# EAGLE board ALL copy (EAGLE 9.2.2)
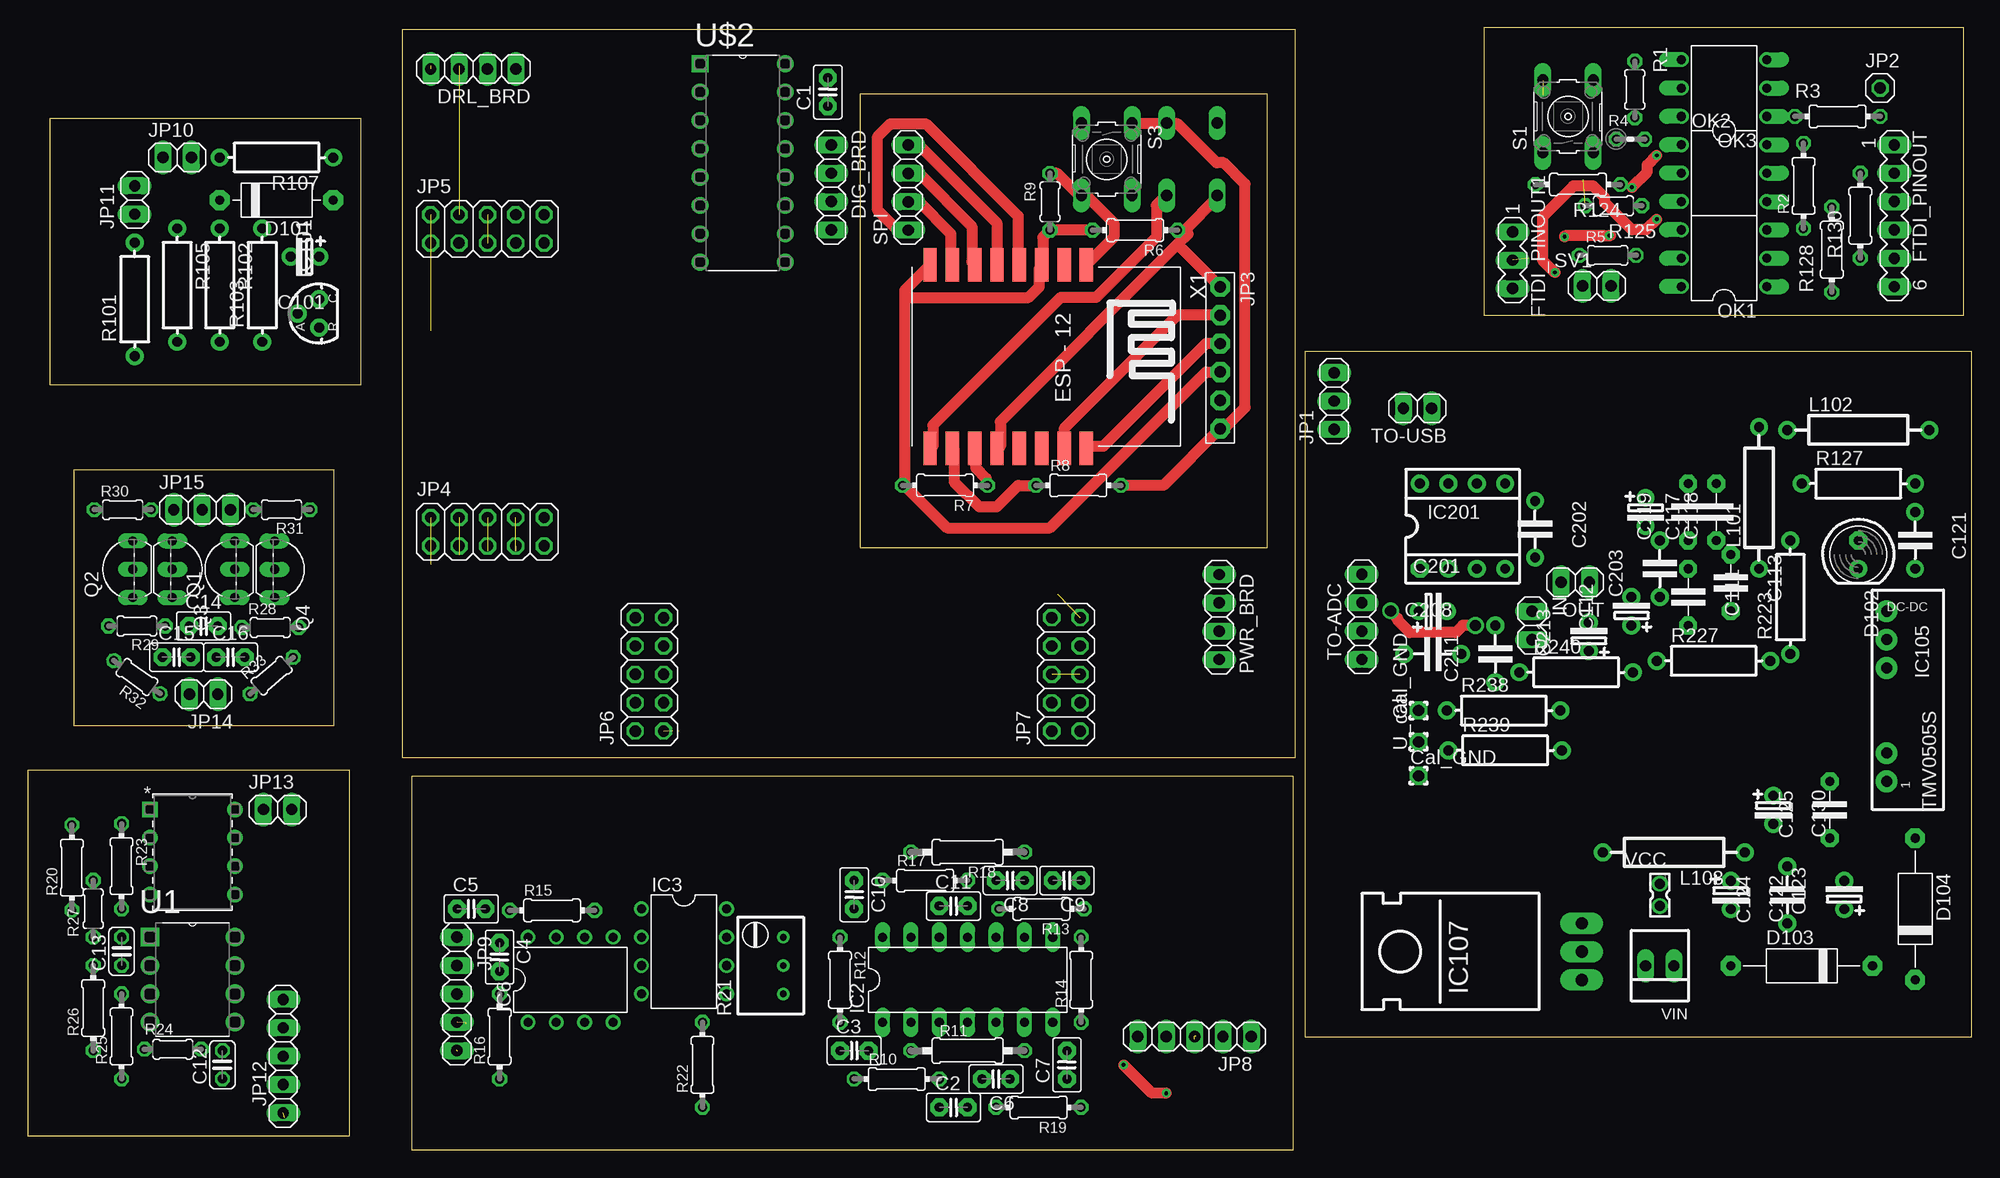
[diagram p0: board, top side]
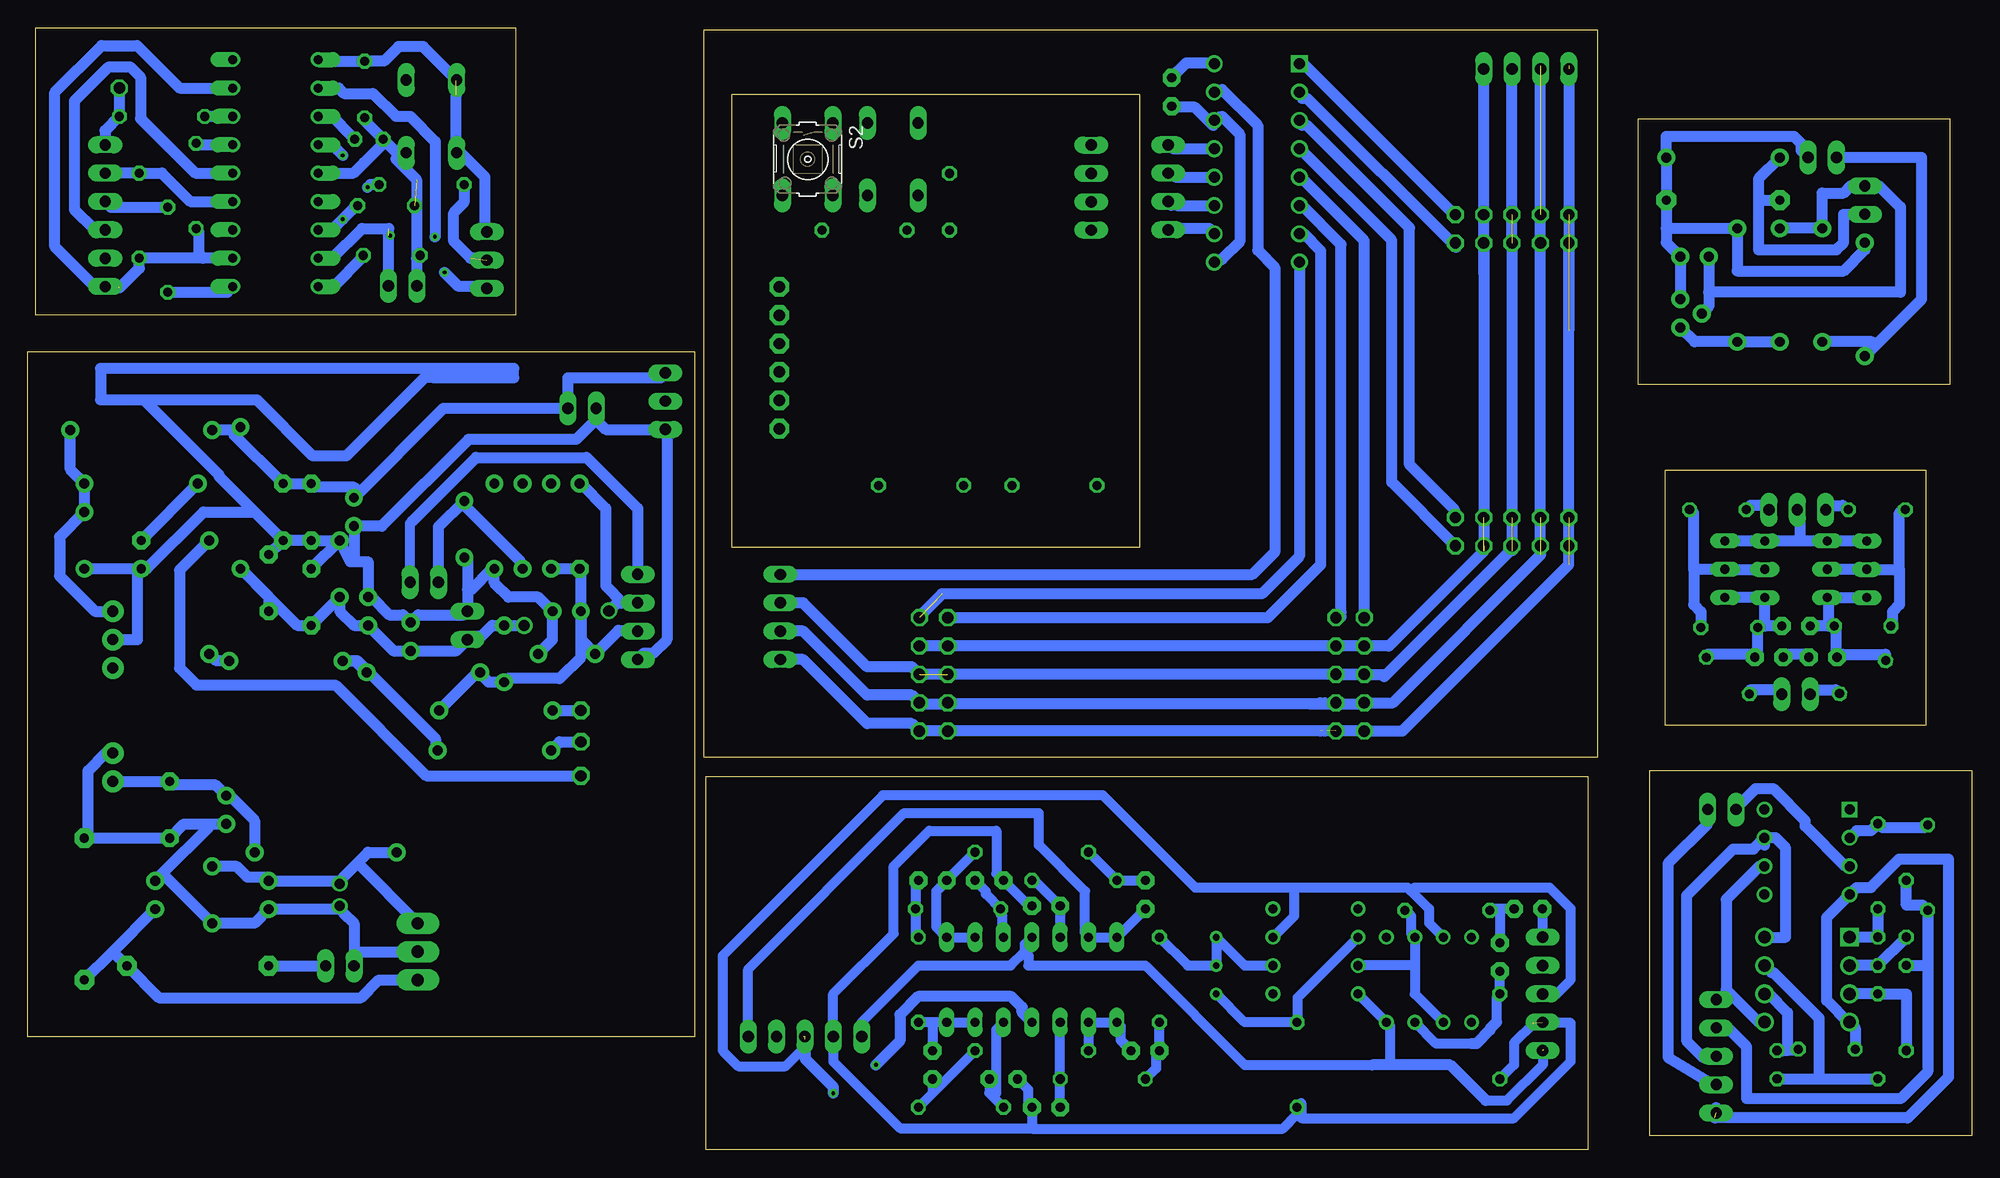
[diagram p1: board, bottom side, seen from below]

Size 174.03 x 100.48 mm. Coordinates in mm from the lower left corner, seen from the top.
Outline: 114.36,10.14 174.03,10.14 174.03,71.5 114.36,71.5 114.36,10.14
Outline: 130.37,74.78 173.31,74.78 173.31,100.48 130.37,100.48 130.37,74.78
Outline: 74.49,94.56 74.49,53.94 110.99,53.94 110.99,94.56 74.49,94.56
Outline: 33.52,35.16 113.51,35.16 113.51,100.3 33.52,100.3 33.52,35.16
Outline: 1.94,68.56 29.86,68.56 29.86,92.36 1.94,92.36 1.94,68.56
Outline: 0,1.28 28.81,1.28 28.81,33.97 0,33.97 0,1.28
Outline: 27.41,38.03 27.41,60.87 4.12,60.87 4.12,38.03 27.41,38.03
Outline: 34.34,0 113.33,0 113.33,33.45 34.34,33.45 34.34,0
Copper layers (1*16): Top 0.035mm / dielectric 1.5mm / Bottom 0.035mm
Design rules "default *": minimum track width 0.9mm, minimum drill 0.35mm, track to track 0.6mm, track to pad 0.6mm, pad to pad 0.6mm, via to via 0.6mm, smd to smd 6mil, copper to edge 40mil, drill to drill 6mil, minimum pad ring 10mil, minimum via ring 8mil, stop-mask expansion 4mil, vias tented up to drill 0mil, thermal gap 10mil
tKeepout: 13 lines

## Footprints (pad centres in the part's own frame; a part is rotated, then mirrored left to right if it is on the bottom)
C2.5-2 = drill 0.813 pad 1.6 octagon: 1 -1.27,0; 2 1.27,0
C025-024X044 = drill 0.813 octagon: 1 -1.27,0; 2 1.27,0
EL25B = drill 0.889 pad 1.6: 1 -1.27,0; 2 1.27,0
C-5 = drill 0.813 pad 1.6 octagon: 1 -2.54,0; 2 2.54,0
C-5@1 = drill 0.889 pad 1.6: 1 -2.54,0; 2 2.54,0
C-5' = drill 0.889 pad 1.6: 1 -2.54,0; 2 2.54,0
D-10 = drill 0.813 pad 1.778 octagon: 1 -5.08,0; 2 5.08,0
LED5 = drill 0.813 pad 1.6 octagon: A -1.27,0 | drill 0.813 pad 1.6: K 1.27,0
D-12,5 = drill 0.813 pad 1.778 octagon: 1 -6.35,0; 2 6.35,0
1X04 = drill 1.016 long: 1 -3.81,0; 2 -1.27,0; 3 1.27,0; 4 3.81,0
MA06-1 = drill 1.016 long: 1 -6.35,0; 2 -3.81,0; 3 -1.27,0; 4 1.27,0; 5 3.81,0; 6 6.35,0
MA03-1 = drill 1.016 long: 1 -2.54,0; 2 0,0; 3 2.54,0
DIL14 = drill 0.813 long: 1 -7.62,-3.81; 2 -5.08,-3.81; 3 -2.54,-3.81; 4 0,-3.81; 5 2.54,-3.81; 6 5.08,-3.81; 7 7.62,-3.81; 8 7.62,3.81; 9 5.08,3.81; 10 2.54,3.81; 11 0,3.81; 12 -2.54,3.81; 13 -5.08,3.81; 14 -7.62,3.81
DIL08 = drill 0.813 pad 1.27: 1 -3.81,-3.81; 2 -1.27,-3.81; 3 1.27,-3.81; 4 3.81,-3.81; 5 3.81,3.81; 6 1.27,3.81; 7 -1.27,3.81; 8 -3.81,3.81
TO92-CLP = drill 0.889 pad 1.6: A 0,1.905; C 1.27,0; R -1.27,0
MEJDCDC-SC = drill 0.991 pad 1.93: 1 1.27,6.35; 2 1.27,3.81; 5 1.27,-3.81; 7 1.27,-8.89 | drill 1 pad 1.93: 6 1.27,-6.35
78XXL_S = drill 1.092 pad 1.905 long: GND 0,-0.635; IN -2.54,-0.635; OUT 2.54,-0.635
DIL-08 = drill 0.889 pad 1.6 octagon: 1 -3.81,-3.81 | drill 0.889 pad 1.6: 2 -1.27,-3.81; 3 1.27,-3.81; 4 3.81,-3.81; 5 3.81,3.81; 6 1.27,3.81; 7 -1.27,3.81; 8 -3.81,3.81
1X02 = drill 1.016 long: 1 -1.27,0; 2 1.27,0
1X03 = drill 1.016 long: 1 -2.54,0; 2 0,0; 3 2.54,0
1X01 = drill 1.016 octagon: 1 0,0
1X06-BIG = drill 1.016 pad 1.778 octagon: 1 -6.35,0; 2 -3.81,0; 3 -1.27,0; 4 1.27,0; 5 3.81,0; 6 6.35,0
2X05 = drill 1.016 octagon: 1 -5.08,-1.27; 2 -5.08,1.27; 3 -2.54,-1.27; 4 -2.54,1.27; 5 0,-1.27; 6 0,1.27; 7 2.54,-1.27; 8 2.54,1.27; 9 5.08,-1.27; 10 5.08,1.27
1X05 = drill 1.016 long: 1 -5.08,0; 2 -2.54,0; 3 0,0; 4 2.54,0; 5 5.08,0
R-12,5 = drill 0.889 pad 1.6: 1 -6.35,0; 2 6.35,0
DIL06 = drill 0.813 offset: 1 -2.54,-3.81; 2 0,-3.81; 3 2.54,-3.81; 4 2.54,3.81; 5 0,3.81; 6 -2.54,3.81
WIREPAD1 = drill 0.991 pad 1.6 octagon: 1 0,0
TO92-EBC = drill 0.813 long: B 0,-1.27; C -2.54,-1.27; E 2.54,-1.27
0204/5 = drill 0.813 octagon: 1 -2.54,0; 2 2.54,0
0204/7 = drill 0.813 octagon: 1 -3.81,0; 2 3.81,0
0204V = drill 0.813 octagon: 1 -1.27,0; 2 1.27,0
0207/10 = drill 0.813 octagon: 1 -5.08,0; 2 5.08,0
RTRIM3299W = drill 0.61: 1 1.27,-2.54; 2 1.27,0; 3 1.27,2.54
R-10 = drill 0.889 pad 1.6: 1 -5.08,0; 2 5.08,0
B3F-10XX = drill 1.016 long: 1 -3.251,2.261; 2 3.251,2.261; 3 -3.251,-2.261; 4 3.251,-2.261
DIP254P762X508-8 = drill 1.118 square: 1 -7.62,7.62 | drill 1.118: 2 -7.62,5.08; 3 -7.62,2.54; 4 -7.62,0; 5 0,0; 6 0,2.54; 7 0,5.08; 8 0,7.62
LT1012ACN8_PDIP-8_N = drill 0.889 pad 1.397 square: 1 -7.62,7.62 | drill 0.889 pad 1.397: 2 -7.62,5.08; 3 -7.62,2.54; 4 -7.62,0; 5 0,0; 6 0,2.54; 7 0,5.08; 8 0,7.62
DIP254P762X432-16 = drill 0.991 square: 1 -7.62,17.78 | drill 0.991: 2 -7.62,15.24; 3 -7.62,12.7; 4 -7.62,10.16; 5 -7.62,7.62; 6 -7.62,5.08; 7 -7.62,2.54; 8 -7.62,0; 9 0,0; 10 0,2.54; 11 0,5.08; 12 0,7.62; 13 0,10.16; 14 0,12.7; 15 0,15.24; 16 0,17.78
87758-0216 = drill 0.9 pad 1.27: 1 0,-1; 2 0,1
22-23-2021 = drill 1 long: 1 -1.27,0; 2 1.27,0
ESP12-SMD = smd 3 x 1.2: ADC -8.3,3.8; CH_PD -8.3,1.8; GND 8.1,-8.2; GPIO0 8.1,-2.2; GPIO2 8.1,-4.2; GPIO4 8.1,1.8; GPIO5 8.1,-0.2; GPIO12 -8.3,-4.2; GPIO13 -8.3,-6.2; GPIO14 -8.3,-2.2; GPIO15 8.1,-6.2; GPIO16 -8.3,-0.2; RESET -8.3,5.8; RXD0 8.1,3.8; TXD0 8.1,5.8; VCC -8.3,-8.2

## Placement (x,y rotation side)
C1  [C2.5-2]  71.62,94.74 90 top
C2  [C2.5-2]  82.87,3.81 0 top
C3  [C2.5-2]  73.98,8.89 0 top
C4  [C2.5-2]  42.23,17.27 270 top
C5  [C2.5-2]  39.69,21.59 0 top
C6  [C2.5-2]  86.68,6.35 180 top
C7  [C2.5-2]  93.03,7.62 90 top
C8  [C2.5-2]  87.95,24.13 180 top
C9  [C2.5-2]  93.03,24.13 180 top
C10  [C2.5-2]  73.98,22.86 270 top
C11  [C2.5-2]  82.87,21.84 0 top
C12  [C025-024X044]  17.41,7.63 90 top
C13  [C025-024X044]  8.38,17.79 90 top
C14  [C2.5-2]  15.73,46.92 0 top
C15  [C2.5-2]  13.31,44.13 0 top
C16  [C2.5-2]  18.14,44.13 0 top
C101  10µF  [EL25B]  24.8,79.99 180 top
C111  100nF  [C-5]  148.65,49.51 270 top
C112  47µF  [EL25B]  143.57,48.24 90 top
C113  10nF  [C-5]  152.46,50.78 270 top
C117  100nF  [C-5]  151.19,57.13 90 top
C118  47µF  [EL25B]  144.84,57.13 270 top
C119  10nF  [C-5]  148.65,57.13 90 top
C121  100nF  [C-5@1]  168.97,54.59 270 top
C122  1µF  [EL25B]  152.46,22.84 270 top
C123  1µF  [EL25B]  162.62,22.84 90 top
C124  100nF  [C-5@1]  157.54,22.84 90 top
C125  100nF  [C-5]  161.35,30.46 90 top
C130  47µF  [EL25B]  156.27,30.46 270 top
C201  47µF tan 1ohm  [EL25B]  125.79,48.24 0 top
C202  10nF  [C-5']  134.95,55.59 270 top
C203  10nF  [C-5']  146.11,52.05 90 top
C208  100nF  [C-5']  125.79,44.43 0 top
C211  100nF  [C-5']  131.38,44.43 90 top
C213  47µF  [EL25B]  139.76,45.97 90 top
D101  1N5818  [D-10]  22.26,85.07 180 top
D102  LED5  [LED5]  163.89,53.32 270 top
D103  1N5818  [D-12,5]  158.81,16.49 0 top
D104  1N5818  [D-12,5]  168.97,21.57 270 top
DIG_BRD  [1X04]  71.92,86.2 270 top
DRL_BRD  [1X04]  39.87,96.82 180 top
FTDI_PINOUT  [MA06-1]  167.11,83.67 270 top
FTDI_PINOUT1  [MA03-1]  132.94,79.68 270 top
IC2  LM324N  [DIL14]  84.14,15.24 0 top
IC3  TL071P  [DIL08]  58.74,17.78 270 top
IC6  TL071P  [DIL08]  48.58,15.24 0 top
IC101  TL431CLP  [TO92-CLP]  26.07,74.91 90 top
IC105  TMV0505S  [MEJDCDC-SC]  167.7,39.35 180 top
IC107  7805  [78XXL_S]  138.49,17.76 90 top
IC201  TLC277P  [DIL-08]  128.46,55.86 0 top
IN  [1X02]  134.68,46.97 270 top
JP1  [1X03]  116.95,67.06 90 top
JP2  [1X01]  165.84,95.1 0 top
JP3  [1X06-BIG]  106.75,70.94 270 top
JP4  [2X05]  41.14,55.37 0 top
JP5  [2X05]  41.14,82.48 0 top
JP6  [2X05]  55.65,42.59 90 top
JP7  [2X05]  92.94,42.59 90 top
JP8  [1X05]  104.46,10.16 180 top
JP9  [1X05]  38.42,13.97 270 top
JP10  [1X02]  13.37,88.88 0 top
JP11  [1X02]  9.56,85.07 90 top
JP12  [1X05]  22.86,8.39 90 top
JP13  [1X02]  22.35,30.49 0 top
JP14  [1X02]  15.73,40.82 180 top
JP15  [1X03]  15.6,57.33 0 top
L101  22µH  [R-12,5]  155,58.4 90 top
L102  22µH  [R-12,5]  163.89,64.48 0 top
L103  22µH  [R-12,5]  147.38,26.65 180 top
OK1  4N27M  [DIL06]  151.87,79.86 90 top
OK2  4N27M  [DIL06]  151.87,87.48 270 top
OK3  4N27M  [DIL06]  151.87,95.1 90 top
OUT  [1X02]  138.54,50.83 180 top
PAD1  Cal_GND  [WIREPAD1]  124.52,33.51 0 top
PAD203  U_cal  [WIREPAD1]  124.52,36.56 90 top
PAD204  Cal_GND  [WIREPAD1]  124.52,39.35 90 top
PWR_BRD  [1X04]  106.66,47.73 270 top
Q1  BC559A  [TO92-EBC]  17.25,52 90 top
Q2  BC559A  [TO92-EBC]  8.11,52 90 top
Q3  BC559A  [TO92-EBC]  14.2,52 270 top
Q4  BC559A  [TO92-EBC]  23.35,52 270 top
R1  1k  [0204/5]  143.87,94.97 270 top
R2  1k  [0204/7]  158.98,86.33 90 top
R3  470R  [0204/7]  162.03,92.56 0 top
R4  1k  [0204V]  143.49,90.52 0 top
R5  1k  [0204/5]  141.46,80.11 0 top
R6  [0204/7]  99.13,82.37 180 top
R7  [0204/7]  82.11,59.51 180 top
R8  [0204/7]  94.05,59.51 0 top
R9  [0204/5]  91.51,84.91 90 top
R10  [0204/7]  77.79,6.35 0 top
R11  [0207/10]  84.14,8.89 0 top
R12  [0204/7]  72.71,15.24 270 top
R13  [0204/7]  90.74,21.59 180 top
R14  [0204/7]  94.3,15.24 90 top
R15  [0204/7]  46.93,21.46 0 top
R16  [0204/7]  42.23,10.16 90 top
R17  [0204/7]  80.33,24.13 0 top
R18  [0207/10]  84.14,26.67 180 top
R19  [0204/7]  90.49,3.81 180 top
R20  [0204/7]  3.94,25.28 90 top
R21  [RTRIM3299W]  66.36,16.51 0 top
R22  [0204/7]  60.39,7.62 90 top
R23  [0204/7]  8.38,25.41 270 top
R24  [0204/5]  12.97,9.03 0 top
R25  [0204/7]  8.38,10.17 90 top
R26  [0204/7]  5.84,12.71 90 top
R27  [0204/5]  5.84,21.6 90 top
R28  [0204/5]  21.69,46.79 0 top
R29  [0204/5]  9.76,46.92 180 top
R30  [0204/5]  8.49,57.33 0 top
R31  [0204/5]  22.71,57.33 180 top
R32  [0204/5]  9.76,42.35 144.5 top
R33  [0204/5]  21.82,42.47 40.4 top
R101  10k  [R-10]  9.56,76.18 90 top
R102  15k  [R-10]  17.18,77.45 270 top
R103  9k1  [R-10]  20.99,77.45 90 top
R105  10k  [R-10]  13.37,77.45 270 top
R107  470  [R-10]  22.26,88.88 180 top
R124  470R  [0204/7]  138.79,86.46 180 top
R125  1k  [0204/5]  141.96,84.55 180 top
R127  1k  [R-10]  163.89,59.67 0 top
R128  470R  [0204/7]  161.52,80.62 90 top
R130  1k  [0204/7]  164.06,83.67 90 top
R223  1M  [R-10]  157.79,49.51 90 top
R227  1M  [R-10]  150.94,43.8 0 top
R238  10k  [R-10]  132.14,39.35 0 top
R239  10k  [R-10]  132.27,35.79 0 top
R240  100  [R-10]  138.62,42.78 0 top
S1  [B3F-10XX]  137.9,92.56 90 top
S2  [B3F-10XX]  104.21,88.72 270 bottom
S3  [B3F-10XX]  96.59,88.72 270 top
SPI  [1X04]  78.81,86.18 90 top
SV1  [1X02]  140.47,77.37 0 top
TO-ADC  [1X04]  119.44,47.73 90 top
TO-USB  [1X02]  124.42,66.42 180 top
U1  TLC1078CP  [DIP254P762X508-8]  18.54,11.44 0 top
U3  LT1012ACN8  [LT1012ACN8_PDIP-8_N]  18.54,22.87 0 top
U$2  MCP3208-CI/P  [DIP254P762X432-16]  67.81,79.5 0 top
VCC  [87758-0216]  146.11,22.84 180 top
VIN  [22-23-2021]  146.11,16.49 180 top
X1  [ESP12-SMD]  88.97,70.94 270 top

## Library data of the parts
C1-C11 C14-C16 = capacitor-wima
C12 C13 R1-R9 R21 R124 R125 R128 R130 = resistor
C101 C202 C203 C208 C211 D101 R101-R103 R105 R107 R223 R227 R238-R240 = DISCRETE
C111-C113 C117-C119 C121 C124 C125 C130 D103 D104 R127 = discrete
C122 C123 C213 L101-L103 = DISCRETE@2
C201 = DISCRETE@3
D102 = led
DIG_BRD DRL_BRD IN JP1 JP2 JP4-JP15 OUT PWR_BRD SPI SV1 TO-ADC TO-USB = pinhead
FTDI_PINOUT FTDI_PINOUT1 = con-lstb; OC_FARNELL: unknown; OC_NEWARK: unknown
IC2 IC3 IC6 = linear
IC101 = V-REG
IC105 = modEEG
IC107 = V-REG@2
IC201 = BURR
JP3 = adafruit
OK1-OK3 = optocoupler; MF: FAIRCHILD SEMICONDUCTOR; MPN: 4N27M; OC_FARNELL: unknown; OC_NEWARK: 72K9939
PAD1 PAD203 PAD204 = WIREPAD@2
Q1-Q4 = transistor-pnp
R10-R19 R22 = eagle-ltspice; SPICEMODEL: NONE; SPICEPREFIX: R
R20 R23-R33 = rcl; SPICEPREFIX: R
S1-S3 = switch-omron; MPN: B3F-1000; OC_FARNELL: 176432; OC_NEWARK: 36M3542
U1 = SnapEDA-Library; MPN: TLC1078CP; OC_FARNELL: -; OC_NEWARK: 90B1029; PACKAGE: PDIP; SUPPLIER: Texas Instruments
U3 = SnapEDA-Library; COPYRIGHT: Copyright C 2016 Accelerated Designs. All rights reserved; DIGIKEY_PART_NUMBER: LT1012ACN8ND; MANUFACTURER_PART_NUMBER: LT1012ACN8; VENDOR: Linear Technology
U$2 = MCP3208-CI_P; AVAILABILITY: Good; DESCRIPTION: 8 Channel SPI Serial Interface 2.7 V 12-Bit A/D Converter Through Hole - PDIP-16; MF: Microchip; MP: MCP3208-CI/P; PACKAGE: DIP-16 Microchip; PRICE: 3.21 USD
VCC = con-molex; MF: MOLEX; MPN: 87758-0216; OC_FARNELL: unknown; OC_NEWARK: 94M1513
VIN = con-molex; MF: MOLEX; MPN: 22-23-2021; OC_FARNELL: 1462926; OC_NEWARK: 25C3832
X1 = esp8266modules

## Nets
2.0V: JP10.1 R101.1 R105.2
+5V: FTDI_PINOUT.4 OK2.5
+5V/1: C122.1 C124.2 IC107.OUT L103.2 VCC.1
+5V/2: D101.2 JP11.1 R107.2
+5V/3: OK1.5 OK3.5 SV1.2
+6TO12V: C123.1 D103.2 D104.2 IC107.IN
/RX: FTDI_PINOUT.2 OK2.4 R130.2
/TX: FTDI_PINOUT.3 R128.2
A-VCC: C111.2 C112.1 C113.2 C203.1 C211.2 C213.1 IC201.8 IN.2 L101.1 TO-ADC.3
CH+: JP14.1 R33.1
CH-: JP14.2 R32.1
CLK: SPI.4 X1.GPIO14
CLK1: DIG_BRD.1 U$2.13
CM: DRL_BRD.1 JP4.7 JP4.8 JP5.7 JP5.8 JP6.7 JP6.8 JP7.7 JP7.8
CMMR: JP12.4 R20.1 R26.2 R27.2
CS: SPI.1 X1.GPIO16
CS1: DIG_BRD.4 U$2.10
D-VCC: C117.2 C118.1 C119.2 JP1.3 L101.2 L102.1 TO-USB.1
D_IN: SPI.2 X1.GPIO13
D_OUT: SPI.3 X1.GPIO12
D_OUT1: DIG_BRD.2 U$2.12
DIN: DIG_BRD.3 U$2.11
DTR: FTDI_PINOUT.1 JP2.1 R3.2
GND: C111.1 C112.2 C113.1 C117.1 C118.2 C119.1 C121.2 C201.2 C202.2 C203.2 C208.2 C213.2 D102.K IC105.6 IC201.4 IN.1 JP1.1 TO-ADC.1 TO-USB.2
GND1: C122.2 C123.2 C124.1 C125.1 C130.2 D104.1 IC105.2 IC107.GND VCC.2 VIN.2
GND2: OK2.2 R1.2 R4.1 R5.1 R125.2 S1.3 SV1.1
GND3: FTDI_PINOUT.6 OK1.2 OK3.2 R2.1 R130.1
GND4: JP3.6 R8.2 S2.1 S3.1
GND5: C1.1 U$2.9 U$2.14
GND6: IC2.11 IC3.4 IC6.4 JP8.5 JP9.5
GND7: C101.2 IC101.A JP11.2 R102.1 R105.1
GND8: JP12.1 R24.1 U1.4 U3.4
INPUT: C5.1 JP9.1
INPUT1: JP13.1 U3.3
N$1: OK3.1 R3.1
N$2: OK2.6 R2.2
N$3: OK3.6 R4.2
N$4: R7.1 X1.GPIO2
N$5: OK1.6 R5.2
N$6: R9.2 S3.4 X1.RESET
N$7: S2.2 X1.GND
N$8: OK2.1 R124.1
N$9: R8.1 X1.GPIO15
N$10: JP3.1 R6.1 S2.4 X1.GPIO0
N$11: JP3.3 X1.TXD0
N$12: JP7.10 U$2.7
N$13: JP3.2 X1.RXD0
N$14: C121.1 IC105.7 L102.2 R127.2
N$15: D102.A R127.1
N$16: JP5.10 U$2.1
N$17: JP7.9 U$2.8
N$18: D103.1 VIN.1
N$19: JP6.9 U$2.6
N$20: JP6.10 U$2.5
N$21: JP4.9 U$2.4
N$22: PWR_BRD.1 U$2.15
N$23: C3.1 R10.1 R12.2
N$24: IC3.6 R12.1 R21.2 R21.3
N$25: JP4.10 U$2.3
N$26: C4.1 C5.2 R15.1
N$27: C2.1 IC2.3 R10.2
N$28: C4.2 IC6.3 R16.2
N$29: C7.1 R11.2 R19.1
N$30: PAD204.1 R238.1
N$31: C7.2 IC2.6 IC2.7 R14.1
N$32: JP5.9 U$2.2
N$33: C6.1 IC2.5 R19.2
N$34: R227.1 R239.2 R240.2
N$35: C9.1 R13.1 R14.2
N$36: C9.2 IC2.8 IC2.9 R18.1
N$37: C8.1 IC2.10 R13.2
N$38: C10.1 R17.1 R18.2
N$39: C11.1 IC2.12 R17.2
N$40: C3.2 IC2.1 IC2.2 R11.1
N$41: IC3.3 IC6.2 IC6.6 R15.2
N$42: IC101.R R102.2 R103.1
N$43: IC3.2 R21.1 R22.2
N$44: C125.2 C130.1 IC105.1 L103.1
N$45: R20.2 R23.1 U3.2
N$46: R223.1 R227.2
N$47: C13.2 R23.2 U1.1
N$48: PAD203.1 R239.1
N$49: C12.2 R24.2 U1.6
N$50: C12.1 R25.1 U1.7
N$51: R25.2 R26.1 U1.3
N$52: C13.1 R27.1 U1.2
N$53: JP12.2 JP13.2
N$54: Q1.B Q4.B R28.2 R31.1
N$55: Q2.B Q3.B R29.2 R30.1
N$56: C14.2 C16.2 Q1.C Q4.E R28.1 R33.2
N$57: C14.1 C15.1 Q2.C Q3.E R29.1 R32.2
N$58: C15.2 C16.1
N$61: OK1.1 R128.1
OUT+: JP15.3 R31.2
OUT-: JP15.1 R30.2
OUTPUT: C10.2 IC2.13 IC2.14 JP8.1
OUTPUT1: JP12.5 U1.5 U3.6
PWM: PAD1.1 R223.2
RST: FTDI_PINOUT1.1 OK3.4 R1.1 S1.1 S1.2
RX: FTDI_PINOUT1.2 R124.2
TX: FTDI_PINOUT1.3 OK1.4 R125.1
V+: DRL_BRD.2 JP4.5 JP4.6 JP5.5 JP5.6 JP6.5 JP6.6 JP7.5 JP7.6 PWR_BRD.2
V-: DRL_BRD.4 JP4.1 JP4.2 JP5.1 JP5.2 JP6.1 JP6.2 JP7.1 JP7.2 PWR_BRD.4
VCC: JP3.4 R6.2 R7.2 R9.1 X1.CH_PD X1.VCC
VCC1: C1.2 U$2.16
VCC2: IC2.4 IC3.7 IC6.7 JP8.3 JP9.3
VCC3: JP12.3 U1.8 U3.7
VGND: C201.1 C208.1 C211.1 IC201.1 IC201.2 R238.2 R240.1 TO-ADC.2
VGND1: DRL_BRD.3 JP4.3 JP4.4 JP5.3 JP5.4 JP6.3 JP6.4 JP7.3 JP7.4 PWR_BRD.3
VGND2: C2.2 C6.2 C8.2 C11.2 JP8.4 JP9.4 R16.1 R22.1
VGND3: JP15.2 Q1.E Q2.E Q3.C Q4.C
VOUT-: IC105.5
VREF: OUT.1 TO-ADC.4
VREF1: C101.1 D101.1 IC101.C JP10.2 R101.2 R103.2 R107.1
VREF(2V): C202.1 IC201.3 OUT.2

## Tracks (layer width: path | path; a pad name or v marks a point on that pad's centre or on a via)
2.0V
  Bottom 1: JP10.1 4.48,88.88 4.48,76.18 8.6,72.05 | R101.1 8.6,72.05 | R105.2 8.92,72.37 8.6,72.05
+5V
  Bottom 1: OK2.5 159.04,87.48 163.93,92.37 163.93,96.05 164.89,97 166.79,97 169.84,93.95 169.84,84.17 168.06,82.4 FTDI_PINOUT.4
+5V/1
  Bottom 1: C124.2 155.32,25.38 154.37,24.43 152.78,24.43 C122.1 146.11,24.11 VCC.1 145.79,24.43 144.52,25.7 | L103.2 143.57,26.65 144.52,25.7 | 144.52,25.7 IC107.OUT
+5V/2
  Bottom 1: JP11.1 11.46,83.8 11.46,81.26 12.1,80.62 19.08,80.62 19.08,85.07 | 19.08,85.07 19.08,86.97 R107.2 | 19.08,85.07 D101.2
+5V/3  (via drill 0.35)  (1 unrouted)
  Top 1: 141.71,81.89 v141.58,81.89 141.07,81.89 141.06,81.87 137.59,81.87 v137.59,81.77
  Bottom 1: OK1.5 146.79,79.86 144.12,82.52 141.71,82.52 141.71,77.32 | OK3.5 146.19,95.1 145.7,94.61 143.12,94.61 141.07,92.56 139.8,92.56 137.56,90.31 137.56,81.81 v137.59,81.77
+6TO12V
  Bottom 1: D104.2 166.43,17.76 | 166.43,17.76 C123.1 | 166.43,17.76 D103.2 162.3,13.63 144.21,13.63 142.62,15.22 IC107.IN
/RX
  Bottom 1: OK2.4 159.49,84.94 162.03,87.48 R130.2 FTDI_PINOUT.2
/TX
  Bottom 1: FTDI_PINOUT.3 166.6,84.43 R128.2
A-VCC  (via drill 1)
  Top 1: v129.6,46.97 128.48,46.97 127.85,46.34 123.73,46.34 122.62,47.45 122.62,47.6 121.98,48.24 v122.02,48.28
  Bottom 1: 120.77,49 122.3,50.53 122.3,57.45 124.52,59.67 IC201.8 | TO-ADC.3 120.77,49 | C113.2 152.46,49.51 L101.1 149.92,46.97 C111.2 C203.1 146.11,48.24 144.84,46.97 C112.1 141.3,44.7 C213.1 135.68,44.7 IN.2 134.36,46.02 133.41,46.02 132.46,46.97 C211.2 v129.6,46.97 | v122.02,48.28 121.29,49 120.77,49
CH+
  Bottom 1: R33.1 19.79,41.2 17.25,41.2 JP14.1
CH-
  Bottom 1: R32.1 12.17,41.2 14.07,41.2 JP14.2
CLK
  Top 1: SPI.4 79.77,89.99 86.75,83.01 86.75,79.52 X1.GPIO14
CLK1
  Bottom 1: U$2.13 71.44,89.66 71.94,89.96
CM  (2 unrouted)
  Bottom 1: 43.68,78.56 DRL_BRD.1 | 43.68,80.96 43.68,53.64 52.19,45.13 JP6.8 JP6.7 JP7.8 JP7.7
CMMR
  Bottom 1: 3.94,16.52 R20.1 4.38,21.92 5.84,21.92 R27.2 | R26.2 3.94,16.52 | 3.94,16.52 3.94,7 6.35,4.58 20.13,4.58 20.13,9.22 21.84,10.93 JP12.4
CS
  Top 1: SPI.1 77.86,82.37 76.08,84.15 76.08,90.75 77.23,91.9 80.4,91.9 88.66,83.64 88.66,79.52 X1.GPIO16
CS1
  Bottom 1: U$2.10 68.26,82.53 71.52,82.53 72.02,82.41
D-VCC
  Bottom 1: L102.1 155.27,64.48 L101.2 | 155.64,64.11 C117.2 C119.2 148.33,59.35 144.84,59.35 144.52,59.03 144.84,58.72 C118.1 136.82,66.42 TO-USB.1 125.69,69.16 117.38,69.16 JP1.3
D_IN
  Top 1: SPI.2 79.77,84.91 82.62,82.05 82.62,79.52 X1.GPIO13
D_OUT
  Top 1: SPI.3 79.77,87.45 84.53,82.69 84.53,79.52 X1.GPIO12
D_OUT1
  Bottom 1: U$2.12 71.29,87.12 71.79,87.28
DIN
  Bottom 1: U$2.11 71.14,84.58 71.64,84.6
DTR
  Bottom 1: JP2.1 R3.2 167.11,91.29 FTDI_PINOUT.1
GND
  Bottom 1: C208.2 127.06,45.7 C201.2 128.33,49.51 131,49.51 132.27,50.78 IC201.4 132.46,52.05 134.36,50.14 134.68,50.14 | 134.68,50.14 134.68,52.78 C202.2 | 134.68,50.14 IN.1 135,47.92 139.08,47.92 C213.2 140.44,47.92 141.67,47.92 143.25,49.51 C112.2 143.57,52.69 144.84,52.69 | 144.84,52.69 C118.2 142.34,55.86 134.58,63.62 124.93,63.62 123.15,65.4 TO-USB.2 | C203.2 C119.1 C117.1 | C203.2 C111.1 | 144.84,52.69 145.16,52.69 C203.2 | C121.2 D102.K | D102.K 163.38,52.05 158.3,57.13 153.73,57.13 | 153.73,57.13 C117.1 | IC105.6 164.21,45.7 164.21,51.73 D102.K | C113.1 C117.1 | TO-USB.2 123.15,65.42 | TO-USB.2 123.15,65.37 122.3,64.52 JP1.1 116.82,64.39 116.82,45.69 118.05,44.46 118.9,44.46 TO-ADC.1 | 153.73,57.13 156.91,60.31 156.91,60.46 163.61,67.16 167.52,67.16 167.52,69.98 130.52,69.98 130.52,69.16 137.7,69.16 138.52,69.98 131.7,69.98 132.52,69.16 138.52,69.16 145.52,62.16 148.52,62.16 153.52,67.16 163.52,67.16
GND1
  Bottom 1: IC107.GND 144.52,17.76 VIN.2 144.84,20.3 145.79,21.25 VCC.2 146.11,21.57 C122.2 153.73,20.3 C124.1 161.99,24.75 | 157.86,29.19 160.08,29.19 C125.1 D104.1 168.65,28.24 168.65,33.95 167.06,35.54 IC105.2 | 157.86,29.19 C130.2 | 161.99,24.75 157.86,28.87 157.86,29.19 | 161.99,24.75 C123.2
GND2  (1 unrouted)
  Bottom 1: 139.23,79.86 139.23,86.91 140.16,87.83 | 139.23,79.86 139.23,77.38 139.17,77.32 | 141.07,88.75 140.81,88.75 140.95,88.62 | 140.95,88.62 140.16,87.83 | OK2.2 144.88,87.48 143.93,88.43 143.93,88.41 142.22,90.13 R4.1 | 140.95,88.62 140.95,89.26 R4.1 | R4.1 143.87,92.17 R1.2 | R5.1 139.17,79.86 139.23,79.86 | S1.3 140.16,87.83
GND3  (1 unrouted)
  Bottom 1: OK3.2 160.44,95.1 164.25,98.91 167.43,98.91 171.62,94.72 171.62,80.87 168.06,77.32 FTDI_PINOUT.6 165.84,77.32 | 165.84,77.19 164.06,78.97 R130.1 158.35,79.86 | OK1.2 158.35,79.86 | R2.1 158.76,82.3 158.76,80.27 158.35,79.86
GND4
  Top 1: S3.1 99.13,91.9 101.67,91.9 S2.1 102.31,91.9 102.94,91.9 106.44,88.41 107.07,88.41 108.98,86.5 108.98,66.5 107.07,64.59 JP3.6 101.67,59.51 R8.2
GND5
  Bottom 1: U$2.9 67.12,79.76 65.52,81.36 65.52,90.96 67.12,92.56 U$2.14 67.92,91.76 69.52,93.36 71.12,93.36 C1.1
GND6  (1 unrouted)
  Bottom 0.9: IC3.4 IC6.4 52.07,11.11 52.07,7.62 53.66,7.62 65.09,7.62 73.98,16.51 84.46,16.51 84.46,17.46 84.77,17.78 | 38.36,8.95 38.36,7.68 41.59,4.45 43.5,4.45 | IC2.11 84.77,18.41 84.77,17.78 | 84.77,17.78 86.05,16.51 94.3,16.51 99.38,11.43 JP8.5
  Bottom 1: 43.5,4.45 46.67,7.62 53.66,7.62
GND7
  Bottom 1: IC101.A 23.53,75.54 23.53,76.81 | C101.2 23.53,76.81 | R102.1 R105.1 13.37,85.7 11.46,85.7 10.83,86.34 JP11.2 8.29,86.34 6.38,84.43 6.38,76.81 23.53,76.81
GND8  (1 unrouted)
  Bottom 1: R24.1 10.43,10.95 U1.4 11.03,11.44 12.98,13.38 12.98,20.82 U3.4 10.29,23.5 9.02,23.5 6.48,26.04 2.07,26.04 2.07,6.52 5.71,2.87 22.99,2.87 | JP12.1 22.86,3.82
INPUT
  Bottom 0.9: C5.1 JP9.1
INPUT1
  Bottom 1: JP13.1 21.08,30.62 19.34,32.36 17.77,32.36 14.9,29.49 14.9,29.01 11.3,25.41 U3.3
N$1
  Bottom 1: R3.1 OK3.1
N$2
  Bottom 1: R2.2 158.85,90.02 OK2.6
N$3
  Bottom 1: R4.2 144.98,90.74 | 144.98,90.74 | 144.98,90.74 146.79,92.56 OK3.6
N$4
  Top 1: R7.1 85.8,59.51 85.8,60.15 84.85,61.1 84.85,62.69 X1.GPIO2
N$5
  Bottom 1: 147.42,77.32 OK1.6 146.66,77.32 144,79.98
N$6
  Top 1: R9.2 92.15,87.45 94.05,85.55 S3.4 94.69,85.55 97.23,83.01 97.23,81.74 95.01,79.52 X1.RESET
N$7
  Top 1: X1.GND 81.04,63 81.04,64.91 92.46,76.34 95.64,76.34 101.04,81.74 101.04,84.59 101.67,85.23 S2.2
N$8  (via drill 0.35)
  Top 1: v143.61,86.21 144.98,87.57 144.98,88.2 v145.84,89.06
  Bottom 1: R124.1 143.36,86.46 v143.61,86.21 | v145.84,89.06 146.79,90.02 OK2.1
N$9
  Top 1: R8.1 88.66,59.51 86.75,57.61 85.16,57.61 82.94,59.83 82.94,62.69 X1.GPIO15
N$10
  Top 1: 103.58,82.37 R6.1 | 103.58,82.37 106.44,85.23 S2.4 | 102.94,81.1 103.9,82.05 103.58,82.37 | 102.94,81.1 87.07,65.23 87.07,63 X1.GPIO0 | 102.94,81.1 JP3.1
N$11
  Top 1: JP3.3 105.48,72.21 96.27,63 95.01,63 X1.TXD0
N$12
  Bottom 1: U$2.7 59.8,82.04 58.27,80.51 58.27,52.41 63.01,47.67 JP7.10
N$13
  Top 1: JP3.2 102.94,74.75 92.78,64.59 92.78,63 X1.RXD0
N$14
  Bottom 1: L102.2 170.24,60.94 R127.2 C121.1 171.19,54.91 171.19,51.42 168.02,48.24 IC105.7
N$15
  Bottom 1: R127.1 D102.A
N$16
  Bottom 1: U$2.1 59.92,97.36 46.32,83.76 46.22,83.5
N$17  (1 unrouted)
  Bottom 1: U$2.8 60.19,53.16 63.55,49.8 92.19,49.8 94.35,47.64
N$18
  Bottom 1: D103.1 VIN.1
N$19
  Bottom 1: 56.45,47.76 56.45,48.14 | 56.45,48.14 56.45,81.09 59.92,84.56 U$2.6 | JP6.9 56.45,48.14
N$20
  Bottom 1: JP6.10 54.38,81.42 59.92,86.96 U$2.5
N$21
  Bottom 1: 60.21,89.77 51.92,81.47 51.92,59.8 JP4.9
N$22
  Bottom 1: U$2.15 67.12,94.96 63.92,91.76 63.92,80.56 62.39,79.03 62.39,53.54 64.39,51.54 PWR_BRD.1
N$23
  Bottom 0.9: R12.2 C3.1 73.03,8.57 73.03,7.3 R10.1
N$24
  Bottom 0.9: IC3.6 65.09,16.51 R21.3 R21.2 70.17,16.51 R12.1
N$25
  Bottom 1: U$2.3 59.92,91.76 59.51,91.76 50.32,82.57 50.32,61.36 46.32,57.36 JP4.10
N$26
  Bottom 0.9: C5.2 42.23,21.59 | 42.23,21.59 42.86,21.59 R15.1 | 42.23,21.59 C4.1
N$27
  Bottom 0.9: C2.1 R10.2 IC2.3
N$28
  Bottom 0.9: IC6.3 47.94,9.52 44.77,9.52 | 42.55,11.43 42.55,13.65 R16.2 C4.2
  Bottom 1: 42.55,11.43 43.11,10.87 43.11,10.74 44.33,9.52 44.77,9.52
N$29
  Bottom 0.9: 93.03,5.08 R19.1 | C7.1 93.03,5.08 | 93.03,5.08 R11.2
N$30
  Bottom 1: R238.1 PAD204.1
N$31
  Bottom 0.9: IC2.6 IC2.7 93.03,11.43 | 93.03,11.43 R14.1 | 93.03,11.43 C7.2
N$32
  Bottom 1: 46.15,80.84 59.47,94.16 59.92,94.16 U$2.2
N$33
  Bottom 0.9: 87.63,4.76 87.95,5.08 C6.1 | 87.63,4.76 R19.2 | IC2.5 87.31,10.8 87.31,5.08 87.63,4.76
N$34
  Bottom 1: R239.2 137.54,35.86 137.54,36.81 144.52,43.8 R227.1 144.71,43.8 R240.2
N$35
  Bottom 0.9: R14.2 94.55,19.3 R13.1 94.55,23.88 C9.1
N$36
  Bottom 0.9: IC2.9 IC2.8 92.71,20 92.71,23.18 C9.2 R18.1
N$37
  Bottom 0.9: IC2.10 86.68,19.81 86.81,19.94 86.81,20.96 86.93,21.08 R13.2 88.27,22.92 88.27,23.18 C8.1
N$38
  Bottom 0.9: C10.1 R17.1 R18.2
N$39
  Bottom 0.9: IC2.12 C11.1 83.89,24.13 R17.2
N$40
  Bottom 0.9: R11.1 IC2.2 IC2.1 76.2,11.11 76.2,9.84 C3.2
N$41
  Bottom 0.9: IC6.2 49.85,13.97 49.85,16.51 | 49.85,16.51 IC6.6 50.17,19.37 50.17,20.96 50.48,21.27 R15.2 | 49.85,16.51 IC3.3
N$42
  Bottom 1: R102.2 R103.1 24.8,72.37 IC101.R
N$43
  Bottom 0.9: R21.1 65.09,11.43 R22.2 60.33,11.75 60.33,13.65 IC3.2
N$44
  Bottom 1: IC105.1 C125.2 161.03,32.68 157.22,32.68 C130.1 155.95,31.73 153.73,29.51 L103.1
N$45
  Bottom 1: R20.2 4.13,28.9 8.06,28.9 R23.1 9.02,28.58 10.29,28.58 U3.2
N$46
  Bottom 1: R223.1 157.16,43.8 R227.2
N$47
  Bottom 1: R23.2 C13.2 U1.1
N$48
  Bottom 1: R239.1 126.42,36.56 PAD203.1
N$49
  Bottom 1: C12.2 16.91,8.9 R24.2 16.48,9.16 16.48,12.29 18.18,13.98 U1.6
N$50
  Bottom 1: C12.1 13.64,6.36 | 13.64,6.36 R25.1 | U1.7 17.91,15.89 17.73,15.89 13.64,11.79 13.64,6.36
N$51
  Bottom 1: R26.1 5.84,13.98 R25.2 U1.3
N$52
  Bottom 1: R27.1 C13.1 U1.2
N$53
  Bottom 1: 22.73,5.6 27.18,8.3 27.18,25.66 23.62,29.22 JP13.2
N$54
  Bottom 1: R28.2 24.24,48.19 24.87,48.83 24.87,52 | 24.87,52 Q4.B Q1.B | 24.87,52 24.87,57.08 R31.1
N$55
  Bottom 1: 6.45,52 6.45,48.83 7.09,48.19 7.09,46.92 R29.2 | 6.45,52 Q2.B Q3.B | 6.45,52 6.45,57.08 R30.1
N$56
  Bottom 1: Q4.E Q1.C 18.52,46.92 | C14.2 18.52,46.92 | 18.52,46.92 19.16,46.92 R28.1 | R33.2 23.6,44.38 19.79,44.38 C16.2 19.16,44.38 R28.1 | 18.52,46.92 R28.1
N$57
  Bottom 1: R32.2 7.72,44.38 11.54,44.38 C15.1 12.17,44.38 12.17,46.92 R29.1 12.8,46.92 | 12.8,46.92 12.8,49.46 | 12.8,49.46 Q2.C | 12.8,49.46 Q3.E | 12.8,46.92 C14.1
N$58
  Bottom 1: C16.1 16.61,44.38 14.71,44.38 C15.2
N$61
  Bottom 1: R128.1 156.19,76.81 OK1.1
OUT+
  Bottom 1: R31.2 19.79,57.72 18.52,57.72 JP15.3
OUT-
  Bottom 1: R30.2 11.54,57.72 12.8,57.72 JP15.1
OUTPUT
  Bottom 0.9: C10.2 IC2.14 IC2.13 79.38,19.37 79.38,23.18 83.5,27.31 83.5,30.16 95.57,30.16 109.54,16.19 JP8.1
OUTPUT1
  Bottom 1: U3.6 19,25.41 21.97,22.43 21.97,14.34 | 21.97,14.34 21.97,13.34 22.73,13.34 JP12.5 | 21.97,14.34 19.07,11.44 U1.5
PWM
  Bottom 1: R223.2 160.46,51.92 160.46,43.16 158.94,41.64 146.49,41.64 138.36,33.51 PAD1.1
RST  (1 unrouted)
  Bottom 1: OK3.4 147.93,97.51 R1.1 142.15,97.51 140.86,98.8 138.64,98.8 S1.2 135.68,95.73 | 135.68,94.46 135.68,89.7 S1.1 135.28,89.3 133.12,87.14 133.12,82.83 133.55,82.4
RX  (1 unrouted)
  Bottom 1: 132.55,79.86 134.4,79.86 135.91,81.36 135.91,83.93 134.98,84.86 R124.2
TX  (via drill 0.35)
  Top 1: v145.84,83.35 144.88,82.4 143.61,82.4 141.18,84.83 141.18,85.28 140.15,86.31 138.37,86.31 135.61,83.55 135.61,79.7 v136.72,78.59
  Bottom 1: OK1.4 146.79,82.4 v145.84,83.35 144.63,84.55 R125.1 | 132.55,77.32 135.45,77.32 v136.72,78.59
V+  (4 unrouted)
  Bottom 1: 41.14,97.07 JP5.5 41.14,53.64 41.33,53.64 52.38,42.59 | 52.61,42.36 52.38,42.59 | PWR_BRD.2 104.62,49 98.89,43.27 94.89,43.27 JP7.5 JP6.5 | JP6.6 JP6.5 | JP6.5 52.38,42.59
V-  (8 unrouted)
  Bottom 1: 36.06,80.96 36.06,52.42 50.97,37.51 JP6.2 54.72,37.56 57.72,37.56 58.32,37.51 | 36.06,97.07 36.06,73.36 | JP7.1 93.72,37.56 92.12,37.56 JP7.2 91.32,37.56 58.12,37.56 57.92,37.51 | 94.52,37.56 JP7.1 | PWR_BRD.4 104.62,43.92 98.89,38.19 94.89,38.19 JP7.1
VCC
  Top 1: R6.2 R9.1 90.88,81.74 90.88,79.52 X1.CH_PD 90.56,78.88 90.56,77.29 89.61,76.34 78.49,76.34 | 78.49,76.34 78.49,76.97 80.72,79.2 X1.VCC | 78.49,76.34 78.49,59.51 R7.2 78.81,59.19 82.3,55.7 91.51,55.7 105.48,69.67 JP3.4
VCC1
  Bottom 1: U$2.16 67.92,97.36 70.32,97.36 71.12,96.56 C1.2
VCC2  (via drill 0.35)  (2 unrouted)
  Top 1: v101.92,5.08 100.65,5.08 v98.11,7.62
  Bottom 0.9: IC6.7 48.58,20.32 48.58,21.59 50.17,23.18 | 50.17,23.18 50.48,23.5 60.64,23.5 | 60.64,23.5 69.53,23.5 77.79,31.75 97.47,31.75 111.83,17.4 111.83,8.89 110.43,7.49 106.17,7.49 104.59,9.08 104.59,10.16 | 60.64,23.5 60.64,20.96 IC3.7 | 50.17,23.18 49.85,23.5 37.78,23.5 35.88,21.59 35.88,15.24 37.15,13.97 JP9.3
  Bottom 1: IC2.4 85.02,12.31 85.02,12.78 85.99,13.75 94.33,13.75 95.96,12.12 95.96,9.77 v98.11,7.62 | 104.44,9.89 104.44,8.16 101.92,5.64 v101.92,5.08
VCC3
  Bottom 1: U3.7 17.54,27.95 16.64,27.04 16.64,19.06 U1.8 | 18.54,27.32 U3.7 | U3.7 19.54,26.95 21.35,26.95 25.53,22.78 25.53,9.79 24,8.27 23.88,8.39 JP12.3
VGND
  Bottom 1: R238.2 133.73,42.84 R240.1 133.41,42.53 132.78,41.89 C211.1 131.06,42.21 126.42,42.21 124.52,44.11 C201.1 | IC201.2 IC201.1 124.52,51.73 C201.1 | TO-ADC.2 119.5,46.53 121.15,46.53 C208.1 124.52,45.7 C201.1
VGND1  (3 unrouted)
  Bottom 1: 59.32,39.96 54.72,39.96 JP6.4 51.83,40.05 38.6,53.28 38.6,97.07 | 57.72,39.96 58.32,40.05 | 57.92,40.05 58.12,39.96 91.32,39.96 JP7.4 92.12,39.96 93.72,39.96 JP7.3 94.89,40.73 98.89,40.73 104.62,46.46 PWR_BRD.3
VGND2  (2 unrouted)
  Bottom 0.9: R16.1 40.96,7.62 40.96,9.59 39.25,11.3 | C11.2 84.39,21.84 C8.2 87.31,24.76 87.31,28.57 93.35,28.57 96.52,25.4 96.52,19.37 101.92,13.97 JP8.4 101.92,7.94 95.89,1.9 84.14,1.9 | 84.14,1.9 61.66,1.9 60.39,3.18 R22.1 60.01,4.19 60.01,2.86 40.96,2.86 35.88,7.94 35.88,11.37 39.25,11.37 | 84.14,1.9 C2.2 84.46,4.13 84.46,5.4 C6.2
VGND3
  Bottom 1: Q4.C Q1.E 15.34,54.54 | Q2.E Q3.C 15.34,54.54 | 15.34,54.54 15.34,57.08 JP15.2
VREF
  Bottom 0.9: OUT.1 139.81,56.13 139.65,56.29
  Bottom 1: TO-ADC.4 119.44,57.45 124.01,62.02 133.92,62.02 139.65,56.29
VREF1
  Bottom 1: R101.2 9.56,80.62 11.46,78.72 20.99,78.72 R103.2 27.34,82.53 | IC101.C C101.1 27.34,81.26 27.34,82.53 | JP10.2 15.27,89.51 15.27,90.15 15.91,90.78 27.34,90.78 R107.1 D101.1 27.34,82.53
VREF(2V)
  Bottom 1: OUT.2 137.27,55.81 C202.1 134.95,57.72 129.92,52.69 129.92,52.05 IC201.3